# Altium PCB Retro_Stat_PCB_Layout.PcbDoc (part 2 of 2)
Units mil, origin at the board's own origin, x right, y up, seen from the top; angles counter-clockwise.
Board outline 2340 x 2340 mil, 4 copper layers (Top Layer, Vcc, Gnd, Bottom Layer), stack 60.834 mil thick; 70 components, 57 nets, 289 pads, 146 vias.
Unrouted connection lines stored in the file: 1.
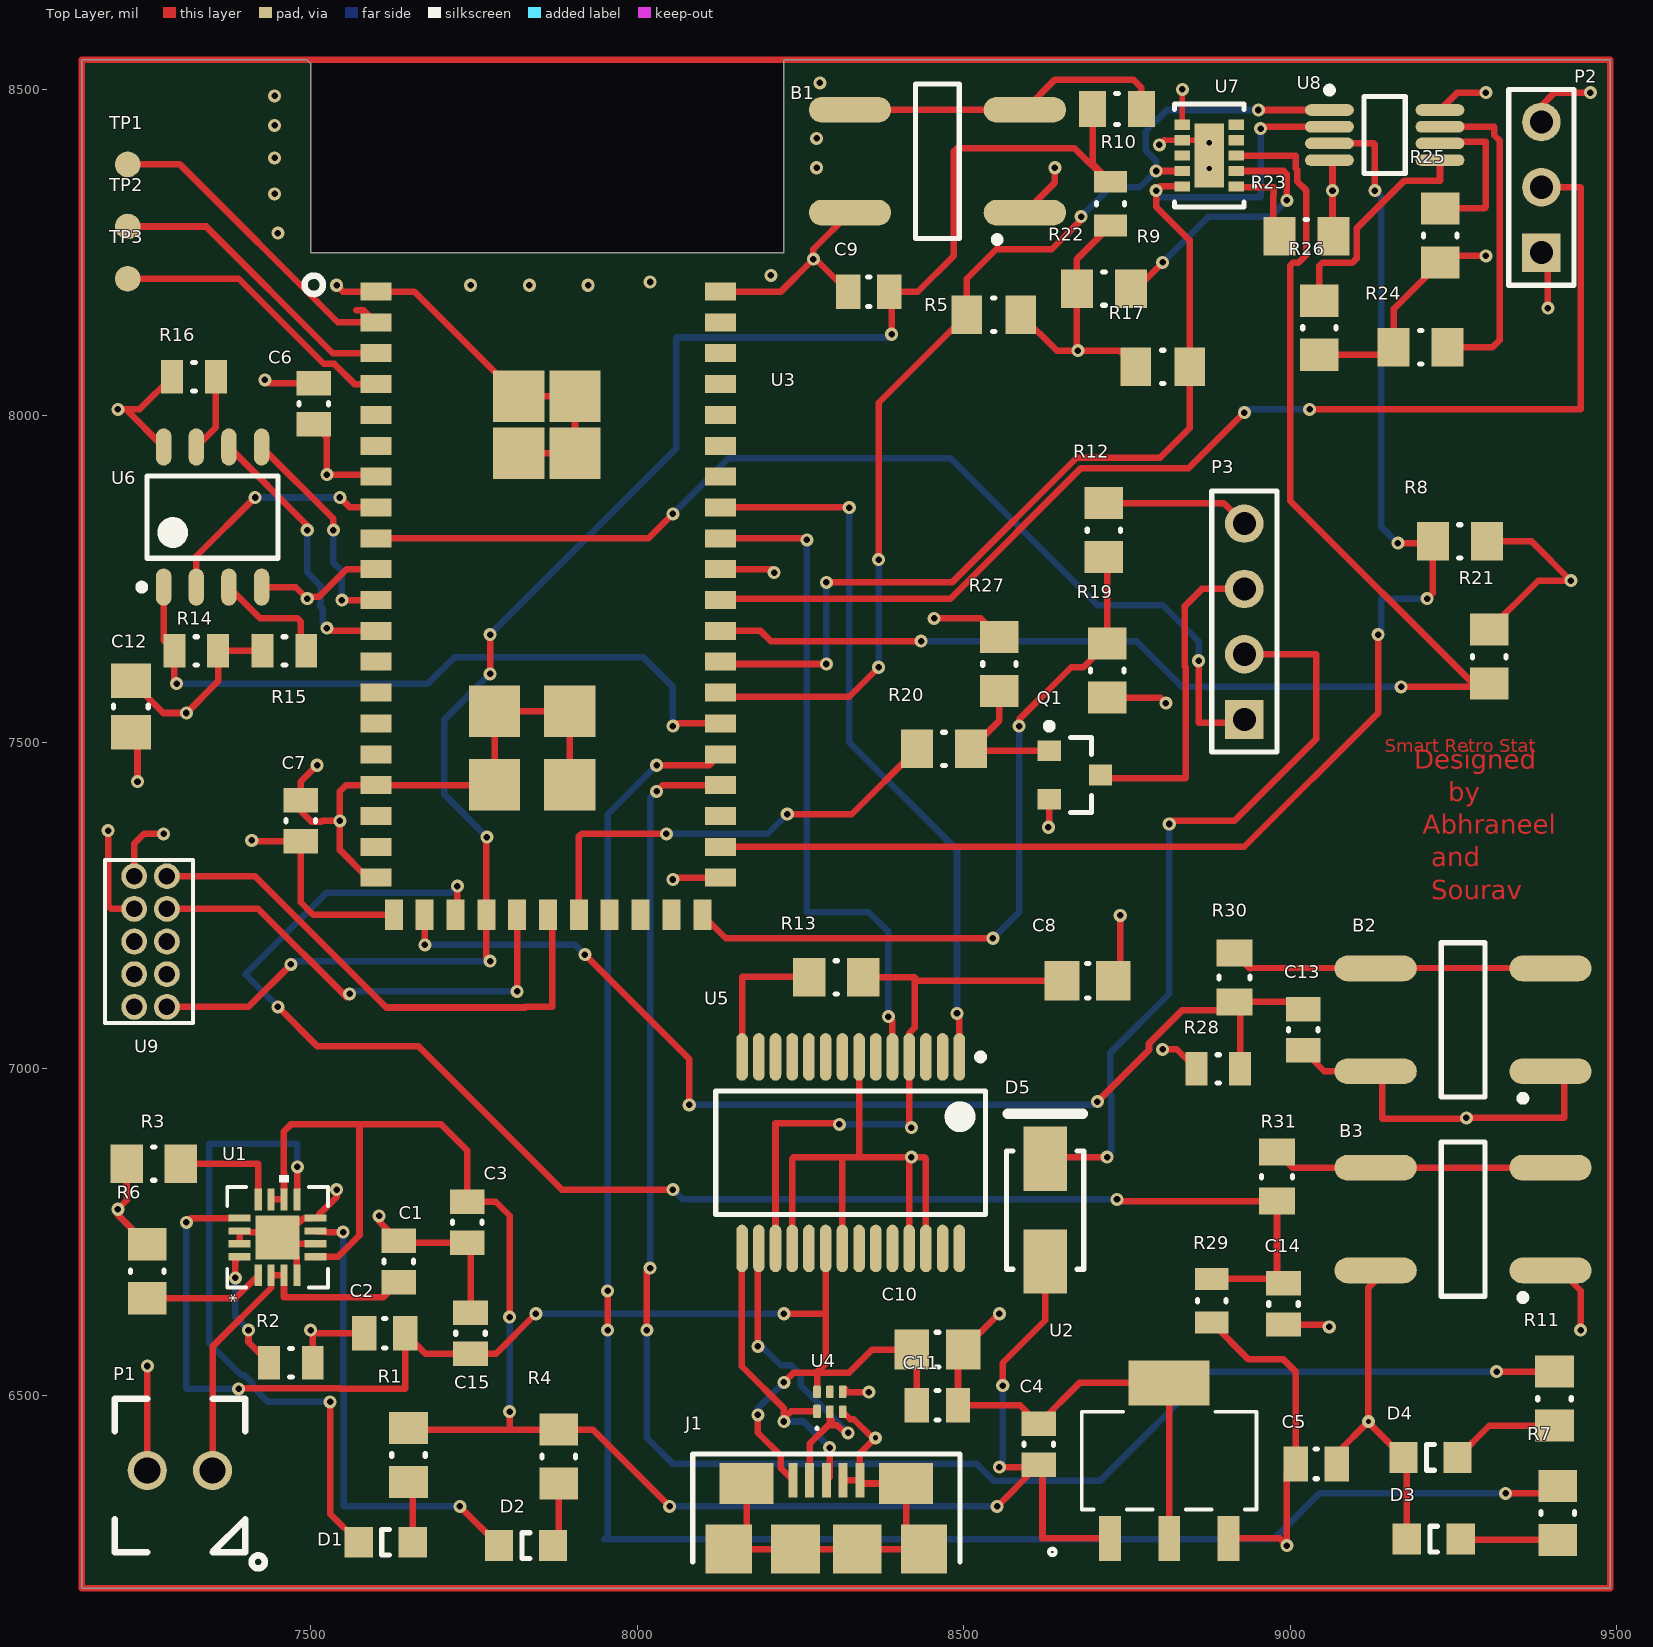
[diagram p0: Top Layer view]

## Via types
v1: diameter 20, hole 10, Top Layer to Bottom Layer, 142 vias
v2: diameter 19.68, hole 7.87, Top Layer to Bottom Layer, 2 vias
v3: diameter 20, hole 8, Top Layer to Bottom Layer, 2 vias

## Nets (pads, with @x,y where several pads share a name; then routed paths per layer and width w, separated by ;. In a path a pad name is that pad's centre, name@x,y a point inside that pad or via, vN(x,y) a via of type N, cw(c..) or ccw(c..) an arc to the next point about the centre after c; other vN are vias at no path point) (continued)
VBatt: (continued)
  Top Layer w10: P1.1 7350,6575 7439.69,6664.69 7439.69,6667.13 ; 7445.2,6683.86 U1.3@7453.86,6683.86 ; 7459.37,6667.13 7459.37,6650.63 7460,6650 7611.5,6650 C1.2
VCCIO: C8.2 R13.2 U5.4 U5.17 | length 944
  Top Layer w10: U5.17 8212.05,6917.05 8307.95,6917.05 v1(8310,6915) ; R13.2 8425,7140 ; v1(8420,6910) 8416.77,6913.23 U5.4 8416.77,7054.73 8425,7062.96 8425,7140 ; C8.2 8430,7135 8425,7140
  Bottom Layer w10: v1(8310,6915) 8415,6915 v1(8420,6910)
pads on no net: U3.5 U3.6 U3.13 U3.14 U3.15 U3.16 U3.18 U3.19 U3.28 U3.29 U3.30 U3.34 U3.45 U3.46 U3.47 U3.48 U3.49 U3.50 U4.5 U5.2 U5.3 U5.6 U5.8 U5.9 U5.10 U5.11 U5.12 U5.13 U5.19 U5.22 U5.23 U5.24 U5.27 U5.28 U7.8 U9.6 U9.7 U9.8
copper on no net: | length 9360
  Top Layer w10: 7150,6205 9490,6205 9490,8545 7150,8545 7150,6205

## Polygon pours and split planes (outlines as drawn)
3.3Vout on Vcc (split plane): 9469.9,6225.1 7170.1,6225.1 7170.1,8524.9 7479.9,8524.9 7479.9,8250 7480.29,8246.08 7481.43,8242.31 7483.29,8238.83 7485.79,8235.79 7488.83,8233.29 7492.31,8231.43 7496.08,8230.29 7500,8229.9 8225,8229.9 8228.92,8230.29 8232.69,8231.43 8236.17,8233.29 8239.21,8235.79 8241.71,8238.83 8243.57,8242.31 8244.71,8246.08 8245.1,8250 8245.1,8524.9 9469.9,8524.9
Gnd on Gnd (split plane): 9469.9,6225.1 7170.1,6225.1 7170.1,8524.9 7479.9,8524.9 7479.9,8250 7480.29,8246.08 7481.43,8242.31 7483.29,8238.83 7485.79,8235.79 7488.83,8233.29 7492.31,8231.43 7496.08,8230.29 7500,8229.9 8225,8229.9 8228.92,8230.29 8232.69,8231.43 8236.17,8233.29 8239.21,8235.79 8241.71,8238.83 8243.57,8242.31 8244.71,8246.08 8245.1,8250 8245.1,8524.9 9469.9,8524.9

## Other copper
Top Layer:
  pour cut-out: 7500,8545 7500,8225 8225,8225 8225,8545
  text "Smart Retro Stat" at 9145,7485 h20
  text "Designed /     by  /  Abhraneel  /   and /   Sourav" at 9190,7250 h50

## Text inside footprints (layer, text, board x,y; h text height)
J1: Mechanical 4 "BOARD EDGE" at 8185.67,6182.01 h20
U1: Top Overlay "*" at 7395.16,6642.13 h20 r90; Mechanical 13 "*" at 7410.16,6710.59 h20 r90